# Altium PCB SGK_DVR_01.PcbDoc (part 7 of 7)
Units mil, origin at the board's own origin, x right, y up, seen from the top; angles counter-clockwise.
Board outline 3070.87 x 2598.47 mil, 6 copper layers (Top, L2 GND, l3 POWER, L4 SIG, L5 GND, Bottom), stack 58.1 mil thick; 475 components, 339 nets, 1964 pads, 1036 vias.
Unrouted connection lines stored in the file: 522.
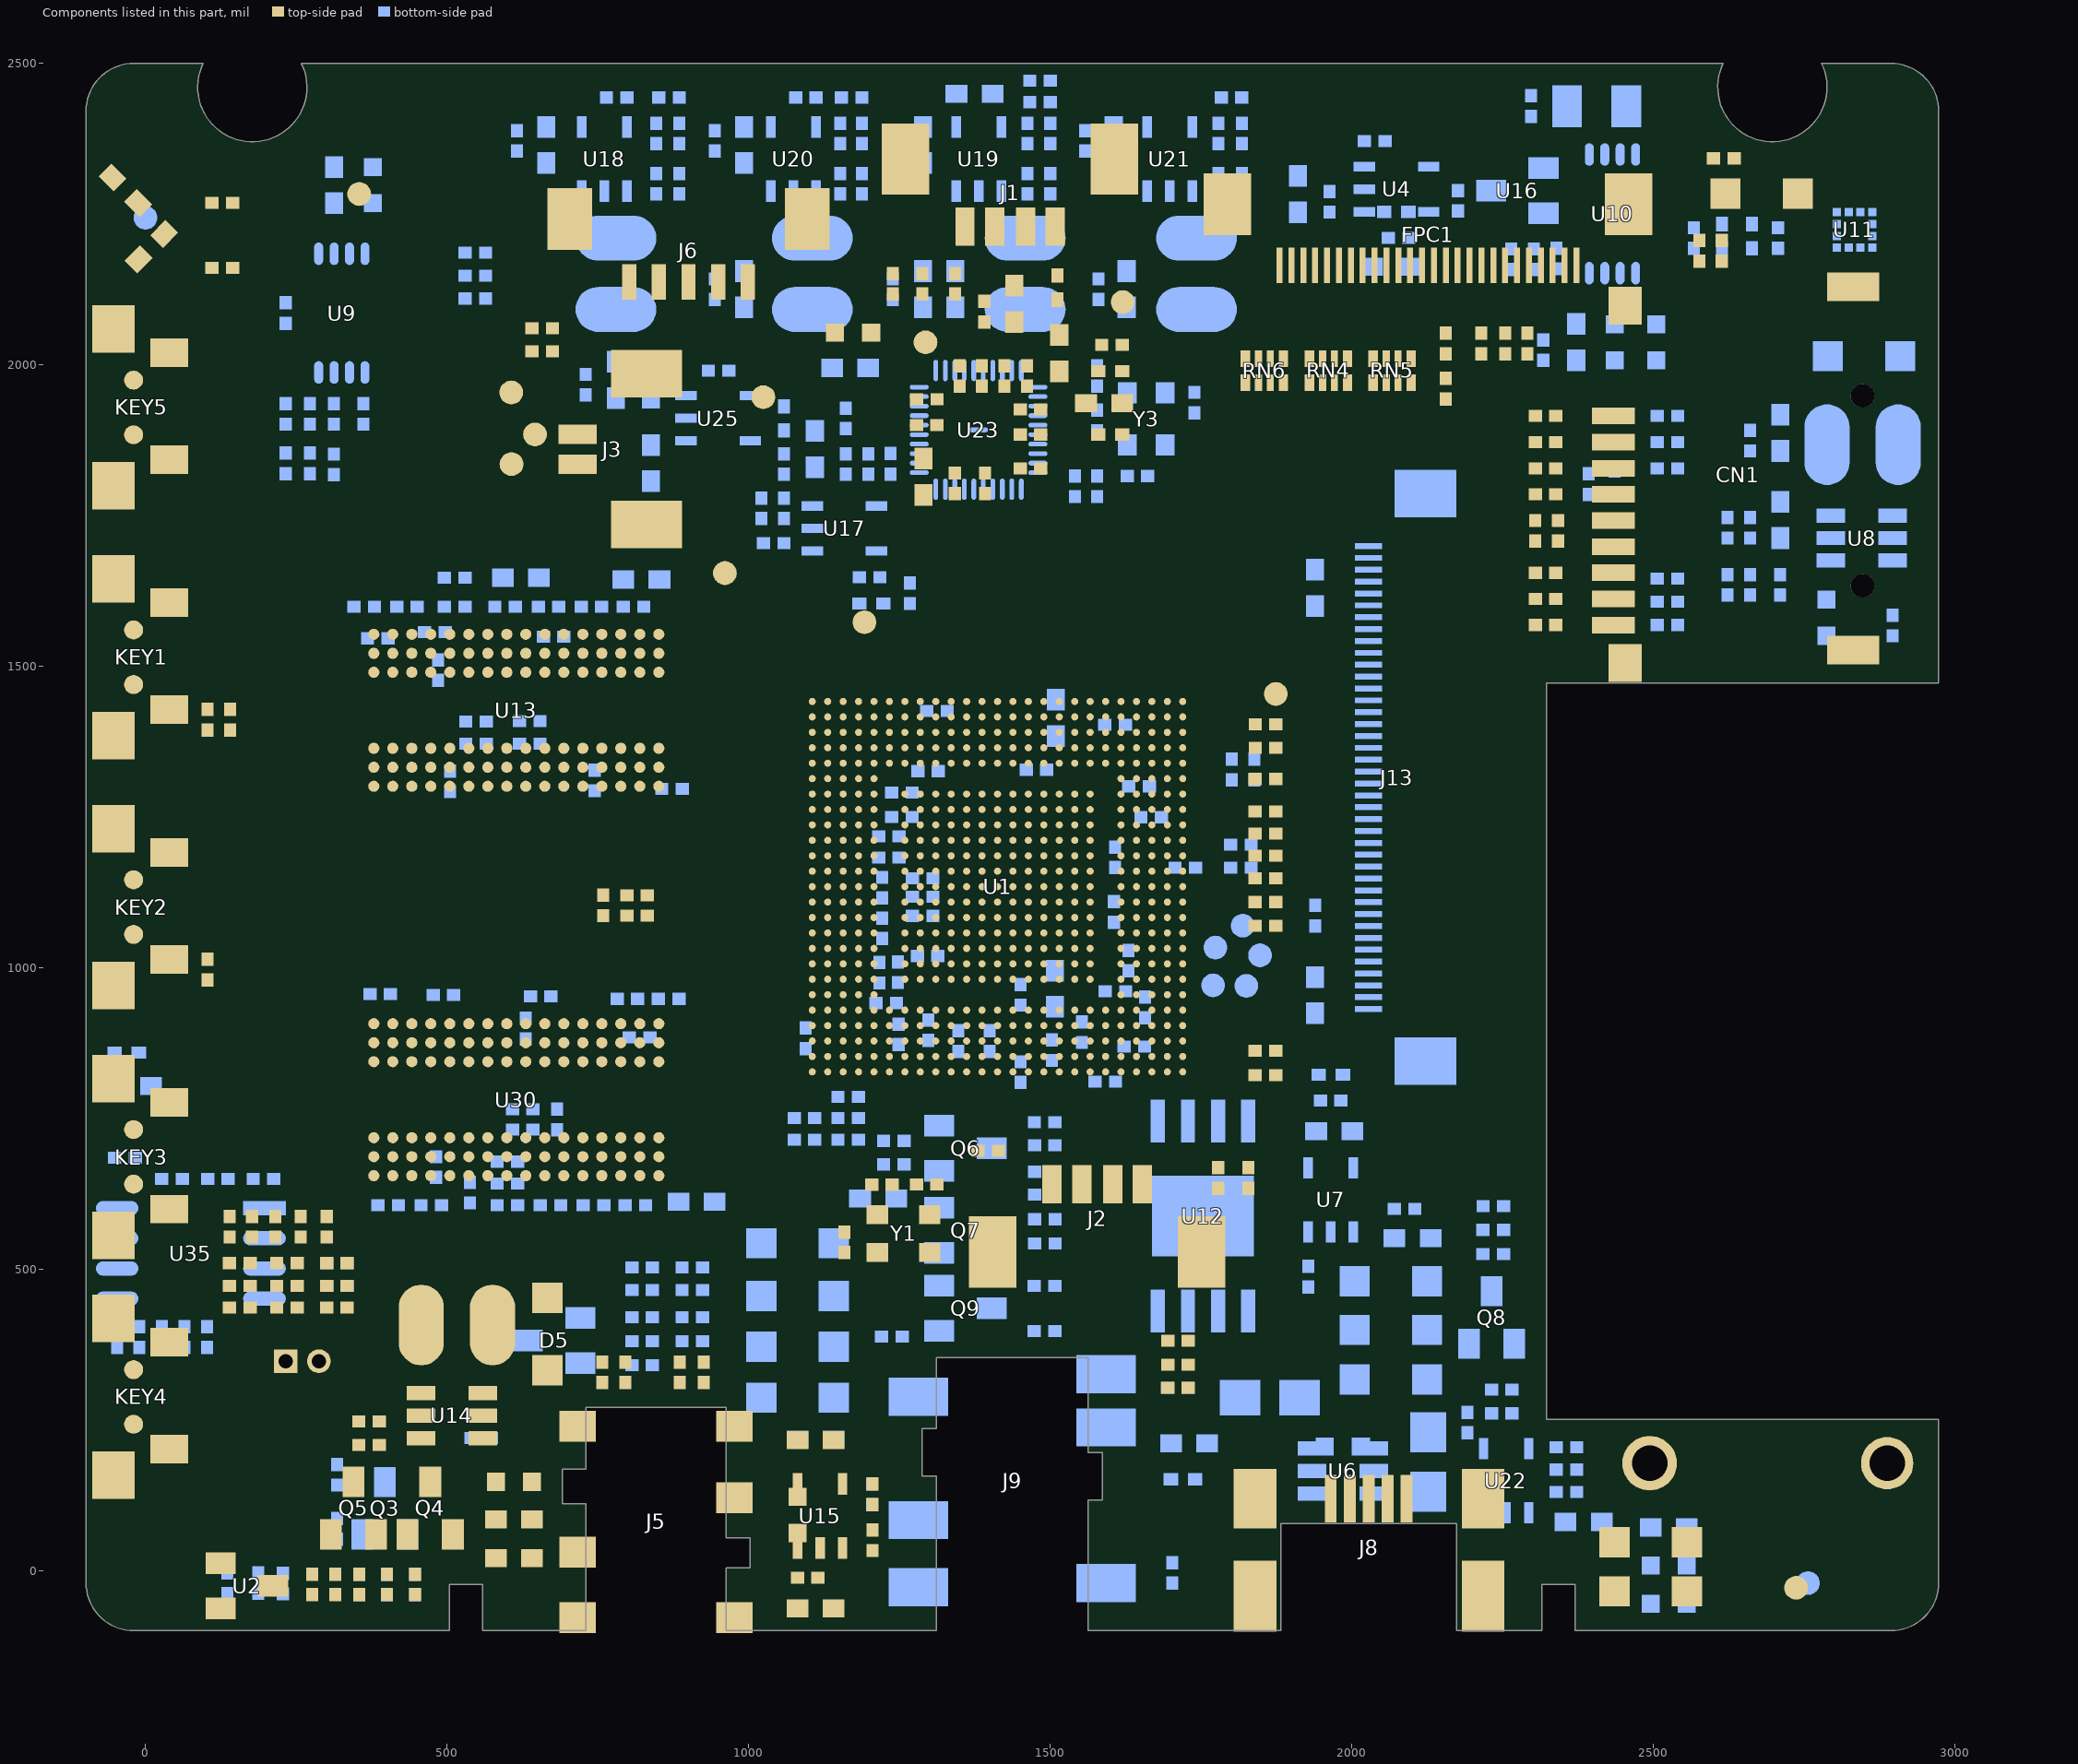
[diagram p9: the components of this part, seen from the top]

## Other copper (continued)
Bottom:
  region net VDD11: 1229.14,2119.15 1492.62,2119.41 1500.45,2118.38 1507.75,2115.36 1514.02,2110.55 1518.82,2104.28 1521.85,2096.98 1522.88,2089.15 1522.62,2089.15 1522.88,2086.49 1521.85,2078.66 1518.82,2071.36 1514.02,2065.1 1507.75,2060.29 1500.45,2057.27 1492.62,2056.23 1492.62,2056.49 1229.14,2056.49 1229.14,2119.15
  region net VBUS: 2540.18,25.78 2671.35,25.78 2671.35,-75.12 2540.18,-75.12 2540.18,25.78
  region net VBAT: 2447.58,211.93 2525.09,211.93 2525.09,-74.28 2447.58,-74.28 2447.58,211.93
  region net N19986950: 1012.79,2306.08 1051.28,2306.08 1051.28,2260.41 1063.14,2248.55 1172.9,2248.55 1172.9,2166.3 1039.17,2166.3 1012.79,2192.67 1012.79,2306.08
  region net DVDD_DDR: 932.66,2119.73 1063.41,2119.73 1090.09,2093.05 1090.09,1926.49 1077.79,1914.19 1044.57,1914.19 1038.16,1920.6 1038.16,1961.72 1029.45,1970.43 1002.09,1970.43 996.86,1975.66 996.86,2005.76 986.53,2016.09 944.59,2016.09 932.66,2028.02 932.66,2119.73
  region net N17862755: 690.79,2306.2 739.67,2306.2 739.67,2262 753.45,2248.21 817.86,2248.21 817.86,2166.35 712.09,2166.35 690.79,2187.64 690.79,2306.2
  region net N17861591: 1320.18,2310.12 1360.11,2310.12 1360.11,2265.16 1377.81,2247.46 1491.53,2247.46 1491.53,2173.49 1375.55,2173.49 1320.18,2228.86 1320.18,2310.12
  region net N17505196: 1638.74,2315.82 1677.49,2315.82 1677.49,2263.83 1692.77,2248.55 1808.4,2248.55 1808.4,2166.53 1687.76,2166.53 1631.92,2222.36 1631.92,2315.85 1638.74,2315.85 1638.74,2315.82
  region net VDD15: 708.37,2136.65 852.88,2136.65 852.88,1976.3 719.36,1976.5 715.46,1975.72 712.15,1973.51 709.94,1970.2 709.17,1966.3 709.36,1966.3 709.65,1954.31 708.52,1948.66 705.32,1943.86 700.53,1940.66 694.87,1939.54 694.87,1939.82 652.22,1939.43 644.42,1940.98 637.8,1945.4 633.38,1952.02 631.83,1959.82 632.22,1959.82 632.14,2023.83 631.64,2026.33 633.4,2035.17 638.41,2042.67 645.91,2047.68 652.21,2048.93 652.22,2048.85 693.54,2048.56 699.33,2049.71 704.23,2052.99 707.51,2057.9 708.67,2063.69 708.37,2063.69 708.37,2136.65
  region net VDDIO33: 1569.01,2120.58 1744.08,2120.58 1744.08,2054.95 1651.92,2054.95 1651.92,2027.35 1569.01,2027.35 1569.01,2120.58
  region net VBAT: 2183.72,500.87 2291.97,500.87 2291.97,431.01 2183.72,431.01 2183.72,500.87
  region net VBUS: 601.48,2465.78 730.52,2465.78 730.52,2377.07 601.48,2377.07 601.48,2465.78
  region net USB_5V: 1981.67,505.39 2033.73,505.78 2041.54,504.23 2048.15,499.81 2052.57,493.2 2054.12,485.39 2053.73,485.39 2053.73,192.16 1981.67,192.16 1981.67,505.39
  region net VBUS: 2067.65,313.79 2068.82,307.94 2072.13,302.98 2072.34,303.18 2077.72,297.39 2082.68,294.07 2088.53,292.91 2088.53,293.2 2142.98,292.91 2148.83,294.07 2153.79,297.39 2157.11,302.35 2158.27,308.2 2157.98,308.2 2157.68,329.11 2158.85,334.96 2162.16,339.93 2167.12,343.24 2172.98,344.41 2172.98,344.11 2202,343.82 2207.85,344.98 2212.82,348.3 2216.13,353.26 2217.3,359.11 2217,359.11 2217.3,398.41 2216.13,404.26 2212.82,409.22 2207.85,412.54 2202,413.7 2202,413.41 2168.91,413.11 2163.06,414.28 2158.1,417.59 2154.78,422.56 2153.62,428.41 2153.91,428.41 2154.21,478.26 2153.04,484.12 2149.73,489.08 2144.77,492.39 2138.91,493.56 2138.91,493.26 2137.3,493.26 2085.77,544.37 2082.46,549.33 2081.3,555.19 2081.59,555.19 2081.88,599 2080.72,604.85 2077.4,609.82 2072.44,613.13 2066.59,614.29 2066.59,614 2007.28,614.29 2001.42,613.13 1996.46,609.82 1993.15,604.85 1991.98,599 1992.28,599 1991.98,536.96 1993.15,531.11 1996.46,526.14 2001.42,522.83 2007.28,521.67 2007.28,521.96 2030.98,522.28 2040.63,521.01 2049.62,517.28 2057.35,511.36 2063.27,503.64 2067,494.64 2068.27,484.99 2067.95,484.99 2067.95,313.79
  region net VBUS: 1542.1,2480.49 1668.68,2480.49 1668.68,2377.67 1542.1,2377.67 1542.1,2480.49
  region net USB_5V: 2049.74,240.88 2225.94,240.88 2225.94,190.66 2049.74,190.66 2049.74,240.88
  region net VBUS: 928.36,2464.95 1047.4,2464.95 1047.4,2376.58 928.36,2376.58 928.36,2464.95
  region net VBUS: 1227.89,2470.47 1362.95,2470.47 1362.95,2376.8 1227.89,2376.8 1227.89,2470.47
  region net USB_PWR: 1859.6,328.81 1860.76,334.66 1864.08,339.62 1869.04,342.94 1874.89,344.1 1874.89,343.81 1952.16,344.1 1958.01,342.94 1962.98,339.62 1966.29,334.66 1967.46,328.81 1967.16,328.81 1967.46,206.26 1966.29,200.41 1962.98,195.44 1958.01,192.13 1952.16,190.96 1952.16,191.26 1874.89,190.96 1869.04,192.13 1864.08,195.44 1860.76,200.41 1859.6,206.26 1859.89,206.26 1859.89,328.81

## Silkscreen, mask and mechanical layers (free items; w line width, h text height)
Silkscreen Top:
  text "TX" at 1338.42,2173 h15
  text "RX" at 1388.5,2173.83 h15
  text "VCC" at 1431.39,2172.99 h15
  text "GND" at 1487.95,2172.36 h15
  text "3.3V" at 1660.39,2074.13 h15
  text "1.1V" at 1278.95,1986.32 h15
  text "1.1V" at 1001.37,1981.96 h15
  text "1.5V" at 511.35,1915.84 h15
  text "SPK-" at 673.24,1908.72 h15
  text "PWOER" at 109.32,1883.07 h15 r90
  text "SPK+" at 672.48,1789.41 h15
  text "SGK_DVR_01" at 1288.82,1603.13 h30
  text "M" at 112.42,1569.42 h15 r90
  text "2018.3.22" at 1288.82,1541.85 h30
  text "UP" at 115.28,1183.61 h15 r90
  text "DOWM" at 111.91,685.57 h15 r90
  text "RESET" at 108.55,229.59 h15 r90
  text "GND" at 2865.39,103.11 h15
Silkscreen Bottom:
  circle w7: c255.91,334.65 r118.11
  lines w7: 381.08,298.45 381.08,532.66 945.85,532.66 945.85,298.45 381.08,298.45